# Altium PCB Famicom.PcbDoc
Units mil, origin at the board's own origin, x right, y up, seen from the top; angles counter-clockwise.
Board outline 2930.07 x 1744.81 mil, 2 copper layers (Top Layer, Bottom Layer); 2 components, 36 nets, 80 pads, 0 vias.
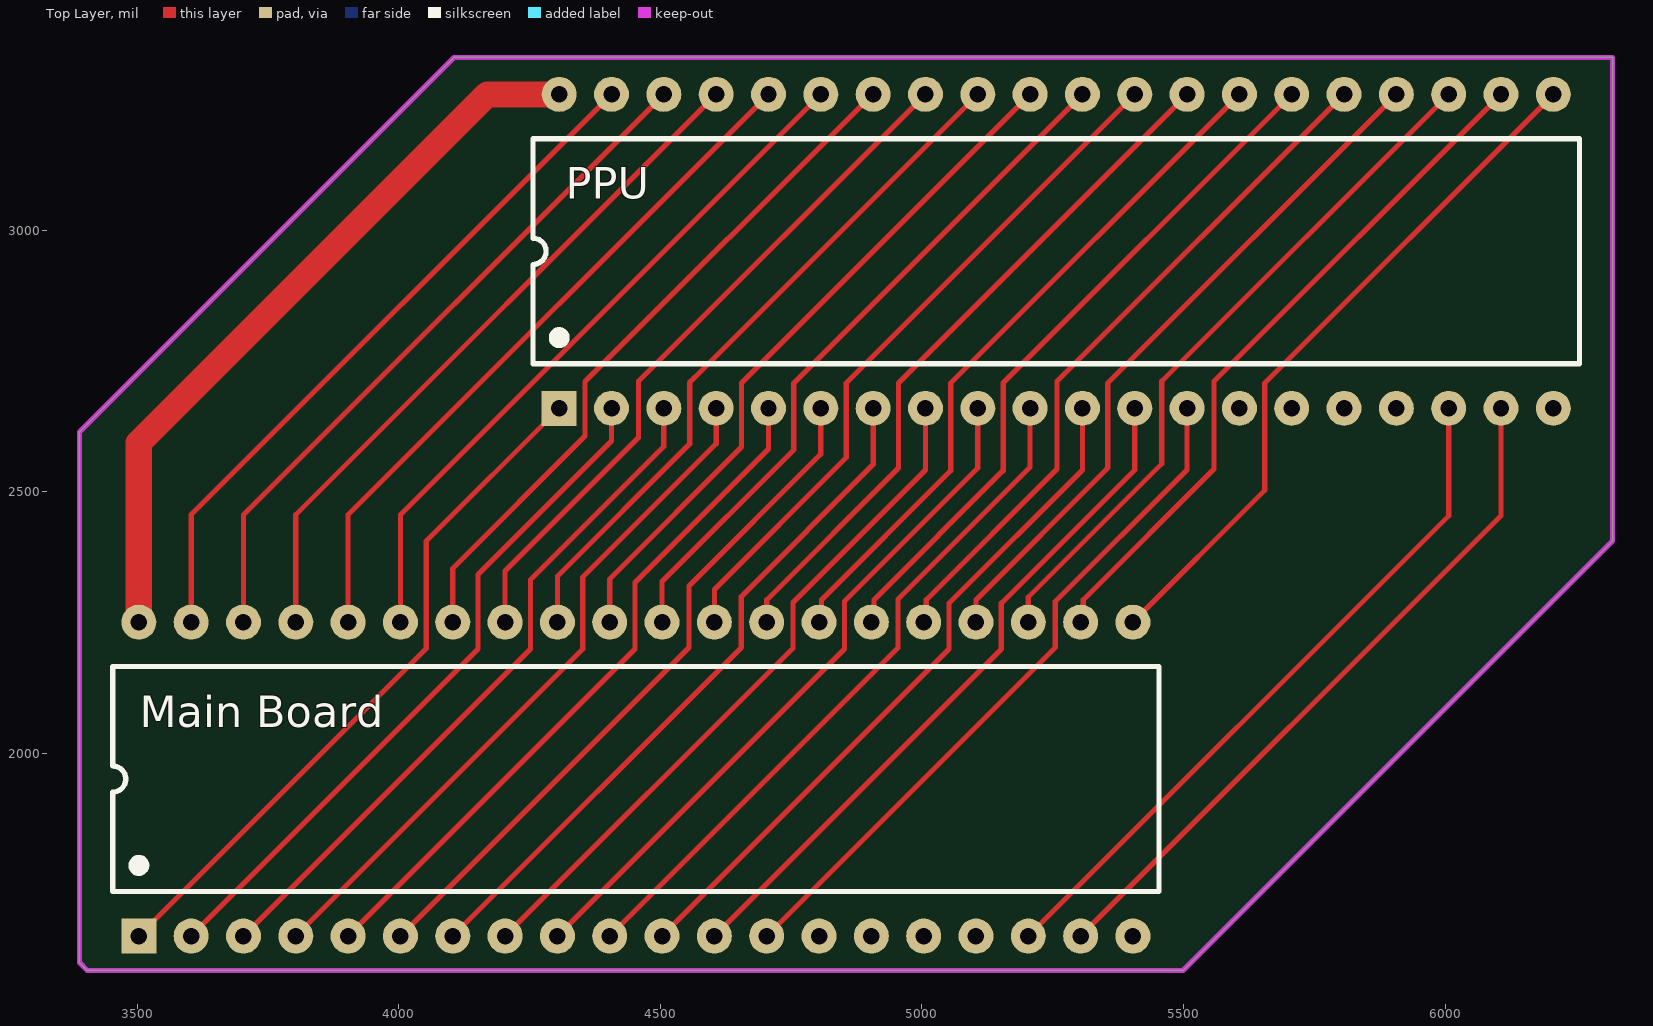
[diagram p0: Top Layer view]
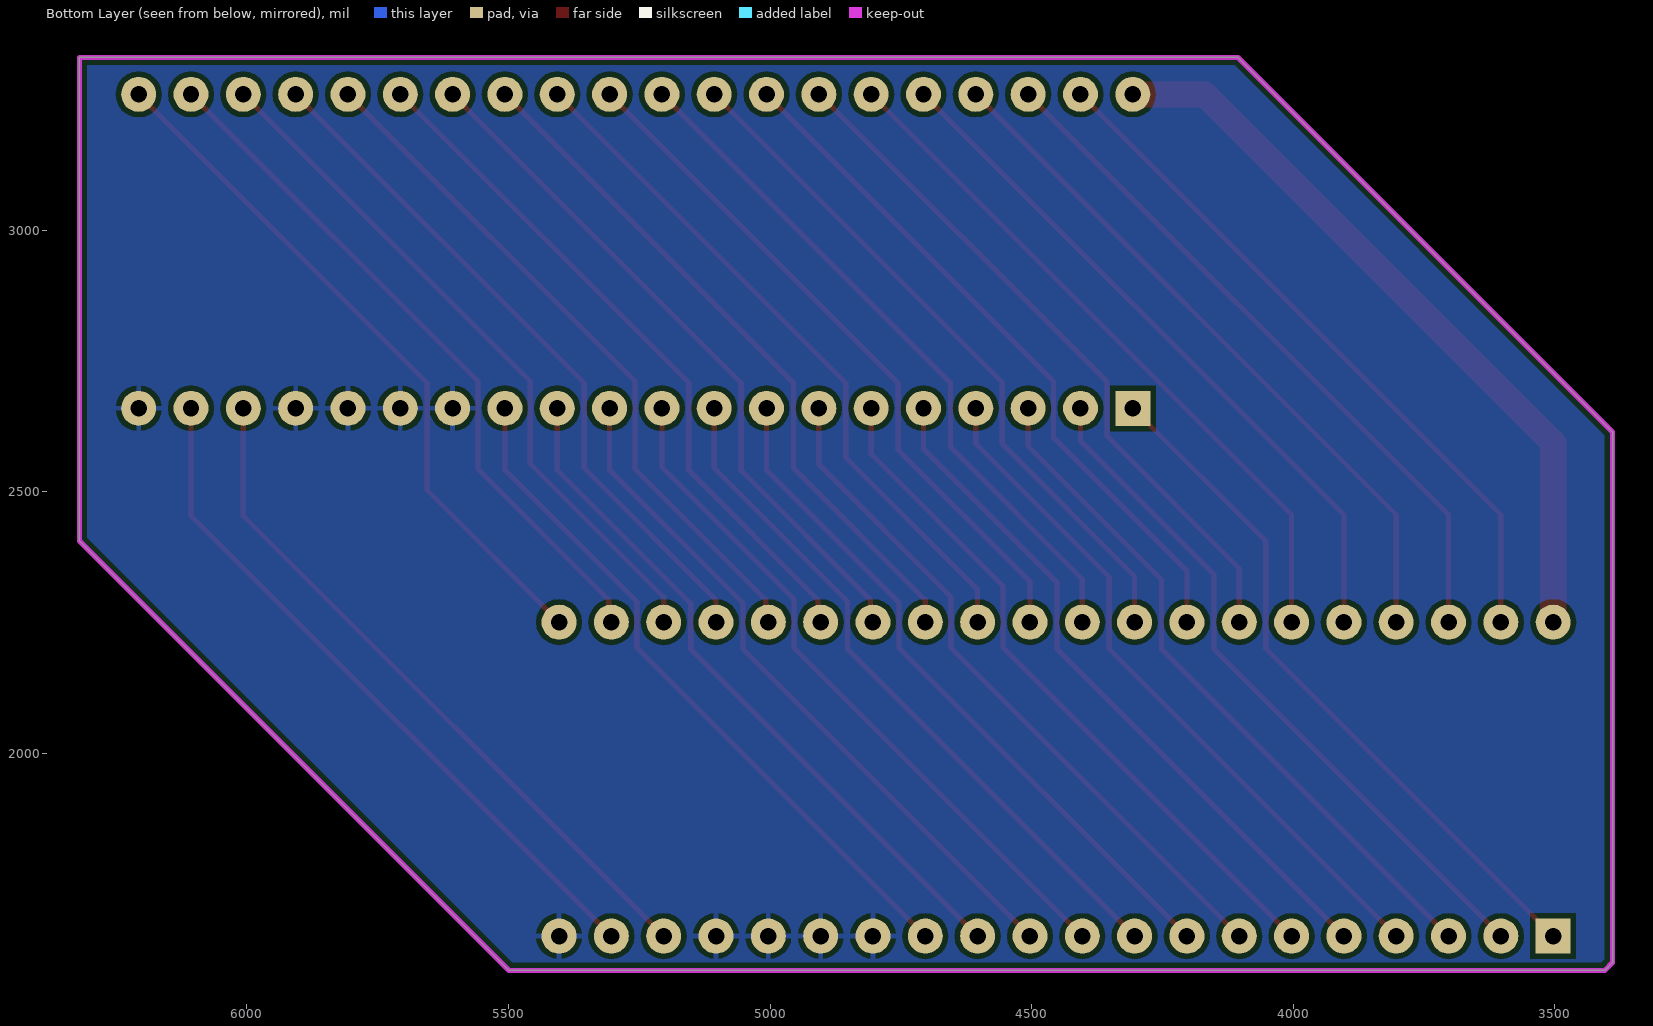
[diagram p1: Bottom Layer view, seen from below]

## Layer stack, top to bottom
Top Solder: solder mask 0.4, Solder Resist, Dk 3.5
Top Layer: signal copper 1.4
Dielectric 1: dielectric 12.6, FR-4, Dk 4.8
Bottom Layer: signal copper 1.4
Bottom Solder: solder mask 0.4, Solder Resist, Dk 3.5

## Board outline
3390,1600 3404.81,1585.19 5499.07,1585.19 6320,2406.12 6320,3330 4105.6,3330 3389.93,2614.32 3390,2614.25

## Design rules (kind name [scope] priority, off if disabled: settings)
Clearance [All] p1: gap=10 ignorepadtopadclearanceinfootprint=FALSE except(0: Arc-Hole Track-Hole SMDPad-Hole THPad-Hole Via-Hole Fill-Hole Poly-Hole Region-Hole Text-Hole)
PolygonConnect [All] p1: connectstyle=Relief reliefconductorwidth=10 reliefentries=4 polygonreliefangle="90 Angle" airgapwidth=10
RoutingVias [All] p1: holewidth=28 width=50 viastyle="Through Hole" minholewidth=28 minwidth=50 maxholewidth=28 maxwidth=50
SolderMaskExpansion [All] p1: expansion=4 istentingtop=FALSE
Width [All] p1: maxlimit=10 minlimit=10 preferedwidth=10
30 further rules are at their usual default settings.

## Components (designator, comment, footprint, x,y, rotation, side; value= is the part's Value field where it differs from the comment)
"Main Board" "PPU" DIP40 4453.38,1950.78 r90 top (schematic designator U1)
PPU "PPU" DIP40 5256.83,2959.5 r90 top (schematic designator U2)

## Footprints (in the part's own frame and the unit in brackets; to place one, negate y for a bottom-side part, rotate by r counter-clockwise, add the part's x,y. Pads: shape width x height; smd on the part's side, far side on the other; paste and mask are expansions set on the pad)
DIP40 [mm]
  rect 1.7x1.7 hole 0.8: 1(-7.62,24.13)
  round 1.7 hole 0.8: 2(-7.62,21.59) 3(-7.62,19.05) 4(-7.62,16.51) 5(-7.62,13.97) 6(-7.62,11.43) 7(-7.62,8.89) 8(-7.62,6.35) 9(-7.62,3.81) 10(-7.62,1.27) 11(-7.62,-1.27) 12(-7.62,-3.81) 13(-7.62,-6.35) 14(-7.62,-8.89) 15(-7.62,-11.43) 16(-7.62,-13.97) 17(-7.62,-16.51) 18(-7.62,-19.05) 19(-7.62,-21.59) 20(-7.62,-24.13) 21(7.62,-24.13) 22(7.62,-21.59) 23(7.62,-19.05) 24(7.62,-16.51) 25(7.62,-13.97) 26(7.62,-11.43) 27(7.62,-8.89) 28(7.62,-6.35) 29(7.62,-3.81) 30(7.62,-1.27) 31(7.62,1.27) 32(7.62,3.81) 33(7.62,6.35) 34(7.62,8.89) 35(7.62,11.43) 36(7.62,13.97) 37(7.62,16.51) 38(7.62,19.05) 39(7.62,21.59) 40(7.62,24.13)
  silkscreen extent -5.46,-25.4 5.46,25.4, body extent -7.91,-26.19 7.65,26.16, height 4.7

## Part data
"Main Board" PPU: library part UMC6528

## Nets (pads, with @x,y where several pads share a name; then routed paths per layer and width w, separated by ;. In a path a pad name is that pad's centre, name@x,y a point inside that pad or via, vN(x,y) a via of type N, cw(c..) or ccw(c..) an arc to the next point about the centre after c; other vN are vias at no path point)
A0: "Main Board.12" PPU.12 | length 1341.5
  Top Layer w10: 4603.38,1650.78 5151.84,2199.24 5151.84,2286.84 5406.83,2541.83 PPU.12
A1: "Main Board.11" PPU.11 | length 1341.5
  Top Layer w10: 4503.38,1650.78 5051.84,2199.24 5051.84,2286.84 5306.83,2541.83 PPU.11
A2: "Main Board.10" PPU.10 | length 1341.5
  Top Layer w10: 4403.38,1650.78 4954.51,2201.91 4954.51,2294.51 5206.83,2546.83 PPU.10
CLK: "Main Board.18" PPU.18 | length 1341.5
  Top Layer w10: 5203.38,1650.78 6006.83,2454.23 PPU.18
D0: "Main Board.2" PPU.2 | length 1341.5
  Top Layer w10: 3603.38,1650.78 4151.84,2199.24 4151.84,2341.84 4406.83,2596.83 PPU.2
D1: "Main Board.3" PPU.3 | length 1341.5
  Top Layer w10: 3703.38,1650.78 4251.84,2199.24 4251.84,2331.84 4506.83,2586.83 PPU.3
D2: "Main Board.4" PPU.4 | length 1341.5
  Top Layer w10: 3803.38,1650.78 4351.84,2199.24 4351.84,2336.84 4606.83,2591.83 PPU.4
D3: "Main Board.5" PPU.5 | length 1341.5
  Top Layer w10: 3903.38,1650.78 4451.84,2199.24 4451.84,2326.84 4706.83,2581.83 PPU.5
D4: "Main Board.6" PPU.6 | length 1341.5
  Top Layer w10: 4003.38,1650.78 4554.92,2202.31 4554.92,2319.92 4806.83,2571.83 PPU.6
D5: "Main Board.7" PPU.7 | length 1341.5
  Top Layer w10: 4103.38,1650.78 4654.92,2202.31 4654.92,2299.92 4906.83,2551.83 PPU.7
D6: "Main Board.8" PPU.8 | length 1341.5
  Top Layer w10: 4203.38,1650.78 4753.45,2200.85 4753.45,2288.45 5006.83,2541.83 PPU.8
D7: "Main Board.9" PPU.9 | length 1341.5
  Top Layer w10: 4303.38,1650.78 4851.84,2199.24 4851.84,2290.68 5106.83,2545.66 PPU.9
DBE: "Main Board.13" PPU.13 | length 1341.5
  Top Layer w10: 4703.38,1650.78 5254.92,2202.31 5254.92,2289.92 5506.83,2541.83 PPU.13
GND: "Main Board.14" "Main Board.15" "Main Board.16" "Main Board.17" "Main Board.20" PPU.14 PPU.15 PPU.16 PPU.17 PPU.20
NetU1_21: "Main Board.21" PPU.21 | length 1341.5
  Top Layer w10: 5403.38,2250.78 5655.3,2502.69 5655.3,2707.96 PPU.21
NetU1_22: "Main Board.22" PPU.22 | length 1341.5
  Top Layer w10: 5303.38,2250.78 5308.38,2255.78 5308.38,2293.38 5558.37,2543.37 5558.37,2711.03 PPU.22
NetU1_23: "Main Board.23" PPU.23 | length 1341.5
  Top Layer w10: 5203.38,2250.78 5203.38,2298.38 5458.37,2553.37 5458.37,2711.03 PPU.23
NetU1_24: "Main Board.24" PPU.24 | length 1341.5
  Top Layer w10: 5103.38,2250.78 5103.38,2293.38 5355.3,2545.3 5355.3,2707.96 PPU.24
NetU1_25: "Main Board.25" PPU.25 | length 1341.5
  Top Layer w10: 5003.38,2250.78 5008.38,2255.78 5008.38,2293.38 5258.37,2543.37 5258.37,2711.03 PPU.25
NetU1_26: "Main Board.26" PPU.26 | length 1341.5
  Top Layer w10: 4903.38,2250.78 4908.38,2255.78 4908.38,2293.38 5155.3,2540.3 5155.3,2707.96 PPU.26
NetU1_27: "Main Board.27" PPU.27 | length 1341.5
  Top Layer w10: 4803.38,2250.78 4808.38,2255.78 4808.38,2293.38 5055.3,2540.3 5055.3,2707.96 PPU.27
NetU1_28: "Main Board.28" PPU.28 | length 1341.5
  Top Layer w10: 4703.38,2250.78 4703.38,2293.38 4955.3,2545.3 4955.3,2707.96 PPU.28
NetU1_29: "Main Board.29" PPU.29 | length 1341.5
  Top Layer w10: 4603.38,2250.78 4603.38,2313.38 4855.3,2565.3 4855.3,2707.96 PPU.29
NetU1_30: "Main Board.30" PPU.30 | length 1341.5
  Top Layer w10: 4503.38,2250.78 4503.38,2328.38 4755.3,2580.3 4755.3,2707.96 PPU.30
NetU1_31: "Main Board.31" PPU.31 | length 1341.8
  Top Layer w10: 4403.38,2250.78 4403.38,2333.38 4655.3,2585.3 4655.3,2684.7 4655,2685 4655,2707.67 PPU.31
NetU1_32: "Main Board.32" PPU.32 | length 1341.5
  Top Layer w10: 4303.38,2250.78 4303.38,2338.38 4556.15,2591.15 4556.15,2708.82 4565,2717.67 PPU.32
NetU1_33: "Main Board.33" PPU.33 | length 1341.5
  Top Layer w10: 4203.38,2250.78 4203.38,2348.38 4458.37,2603.37 4458.37,2711.03 PPU.33
NetU1_34: "Main Board.34" PPU.34 | length 1342.4
  Top Layer w10: 4103.38,2250.78 4103.38,2353.38 4356.37,2606.37 4356.37,2710.49 4905.38,3259.5 PPU.34
NetU1_35: "Main Board.35" PPU.35 | length 1341.5
  Top Layer w10: 4003.38,2250.78 4003.38,2456.05 PPU.35
NetU1_36: "Main Board.36" PPU.36 | length 1341.5
  Top Layer w10: 3903.38,2250.78 3903.38,2456.05 PPU.36
NetU1_37: "Main Board.37" PPU.37 | length 1341.5
  Top Layer w10: 3803.38,2250.78 3803.38,2456.05 PPU.37
NetU1_38: "Main Board.38" PPU.38 | length 1341.5
  Top Layer w10: 3703.38,2250.78 3703.38,2456.05 PPU.38
NetU1_39: "Main Board.39" PPU.39 | length 1341.5
  Top Layer w10: 3603.38,2250.78 3603.38,2456.05 PPU.39
NetU1_40: "Main Board.40" PPU.40 | length 1422
  Top Layer w50: 3503.38,2250.78 3503.38,2593.38 4169.5,3259.5 PPU.40
NMI: "Main Board.19" PPU.19 | length 1341.5
  Top Layer w10: 5303.38,1650.78 6106.83,2454.23 PPU.19
R/W: "Main Board.1" PPU.1 | length 1341.5
  Top Layer w10: 3503.38,1650.78 4052.86,2200.26 4052.86,2405.53 PPU.1

## Polygon pours and split planes (outlines as drawn)
GND on Bottom Layer "GND_L02_P000" (solid, pour order 0): 3390,1600 3404.81,1585.19 5499.07,1585.19 6320,2406.12 6320,3330 4105.6,3330 3389.93,2614.32 3390,2614.25

## Keep-outs
Keep-Out Layer:
  lines w10: 3389.93,2614.32 4105.6,3330 6320,3330 6320,2406.12 5499.07,1585.19 3404.81,1585.19 3390,1600 3390,2614.25